# EAGLE board Grand Lahdi-Bombul (EAGLE 9.7.0)

Size 178.99 x 105.28 mm. Coordinates in mm from the lower left corner, seen from the top.
Outline: 0,0 179,0 179,105.28 0,105.28 0,0
Copper layers (1*16): Top 0.035mm / dielectric 1.5mm / Bottom 0.035mm
Design rules "default": minimum track width 6mil, minimum drill 0.35mm, track to track 6mil, track to pad 6mil, pad to pad 6mil, via to via 6mil, smd to smd 6mil, copper to edge 40mil, drill to drill 6mil, minimum pad ring 10mil, minimum via ring 8mil, stop-mask expansion 4mil, vias tented up to drill 0mil, thermal gap 10mil

## Footprints (pad centres in the part's own frame; a part is rotated, then mirrored left to right if it is on the bottom)
LEDRD254W60D565H860B_G = drill 0.981 pad 1.581: 1 -1.27,0; 2 1.27,0
LEDRD254W60D565H860B_O = drill 0.981 pad 1.581: 1 -1.27,0; 2 1.27,0
HC-SR04 = drill 1.016 long: 1 -3.81,0; 2 -1.27,0; 3 1.27,0; 4 3.81,0
PIEZO = drill 1 pad 1.6: 1 -3.5,0; 2 3.5,0
RESAD1016W63L850D250B = drill 0.83 pad 1.43: 1 -5.08,0; 2 5.08,0
ARDUINO-UNO-R3-SHIELD = drill 1.016 pad 1.88: 3.3V 24.13,-2.54; 5V 24.13,0; A0 24.13,12.7; A1 24.13,15.24; A2 24.13,17.78; A3 24.13,20.32; A4 24.13,22.86; A5 24.13,25.4; AREF -24.13,-13.97; D2 -24.13,20.32; D3 -24.13,17.78; D4 -24.13,15.24; D5 -24.13,12.7; D6 -24.13,10.16; D7 -24.13,7.62; D8 -24.13,3.81; D9 -24.13,1.27; D10 -24.13,-1.27; D11 -24.13,-3.81; D12 -24.13,-6.35; D13 -24.13,-8.89; GND@0 24.13,2.54; GND@1 24.13,5.08; GND@2 -24.13,-11.43; IOREF 24.13,-7.62; NC 24.13,-10.16; RES 24.13,-5.08; RX -24.13,25.4; SCL -24.13,-19.05; SDA -24.13,-16.51; TX -24.13,22.86; VIN 24.13,7.62
TO92 = drill 0.813 octagon: 1 -1.27,0; 2 0,1.905; 3 1.27,0

## Placement (x,y rotation side)
D6  GREEN  [LEDRD254W60D565H860B_G]  21.89,96.64 180 top
D7  ORANGE  [LEDRD254W60D565H860B_O]  44.35,97.38 180 top
DIST1  DISTANCE-SENSOR-4PINHC-SR04  [HC-SR04]  97.17,87.57 0 top
PIEZO3  PIEZO  [PIEZO]  135.18,47.52 0 top
PIEZO4  PIEZO  [PIEZO]  167.26,48.02 0 top
R1  1k  [RESAD1016W63L850D250B]  25.6,86.02 90 top
R2  1k  [RESAD1016W63L850D250B]  50.03,86.76 90 top
U1  ARDUINO-UNO-R3-SHIELD  [ARDUINO-UNO-R3-SHIELD]  47.88,31.6 270 top
U5  TMP36GT9Z_TO92  [TO92]  139.12,4.83 0 top

## Library data of the parts
D6 = Tinkercad; CATEGORY: Opto-Electronic; SUB-CATEGORY: LED; VALUE: LED_GREEN
D7 = Tinkercad; CATEGORY: Opto-Electronic; SUB-CATEGORY: LED; VALUE: LED_ORANGE
DIST1 PIEZO3 PIEZO4 R1 R2 U1 U5 = Tinkercad

## Nets
D6_A: D6.1 R1.2
D7_A: D7.1 R2.2
U1_5V: DIST1.1 U1.5V U5.3
U1_A0: U1.A0 U5.2
U1_D2: DIST1.2 U1.D2
U1_D3: DIST1.3 U1.D3
U1_D7: R2.1 U1.D7
U1_D8: R1.1 U1.D8
U1_D11: PIEZO3.1 U1.D11
U1_D12: PIEZO4.1 U1.D12
U1_GND: D6.2 D7.2 DIST1.4 PIEZO3.2 PIEZO4.2 U1.GND@0 U1.GND@1 U1.GND@2 U5.1

## Tracks (layer width: path | path; a pad name or v marks a point on that pad's centre or on a via)
D6_A  (1 unrouted)
D7_A  (1 unrouted)
U1_5V  (2 unrouted)
U1_A0  (1 unrouted)
U1_D2  (1 unrouted)
U1_D3  (1 unrouted)
U1_D7  (1 unrouted)
U1_D8  (1 unrouted)
U1_D11  (1 unrouted)
U1_D12  (1 unrouted)
U1_GND  (8 unrouted)